# Altium PCB LINKER.PcbDoc (part 2 of 2)
Units mm, origin at the board's own origin, x right, y up, seen from the top; angles counter-clockwise.
Board outline 200 x 129 mm, 4 copper layers (Top Layer, Mid1, Mid2, Bottom Layer), stack 0.603 mm thick; 27 components, 98 nets, 425 pads, 14 vias.
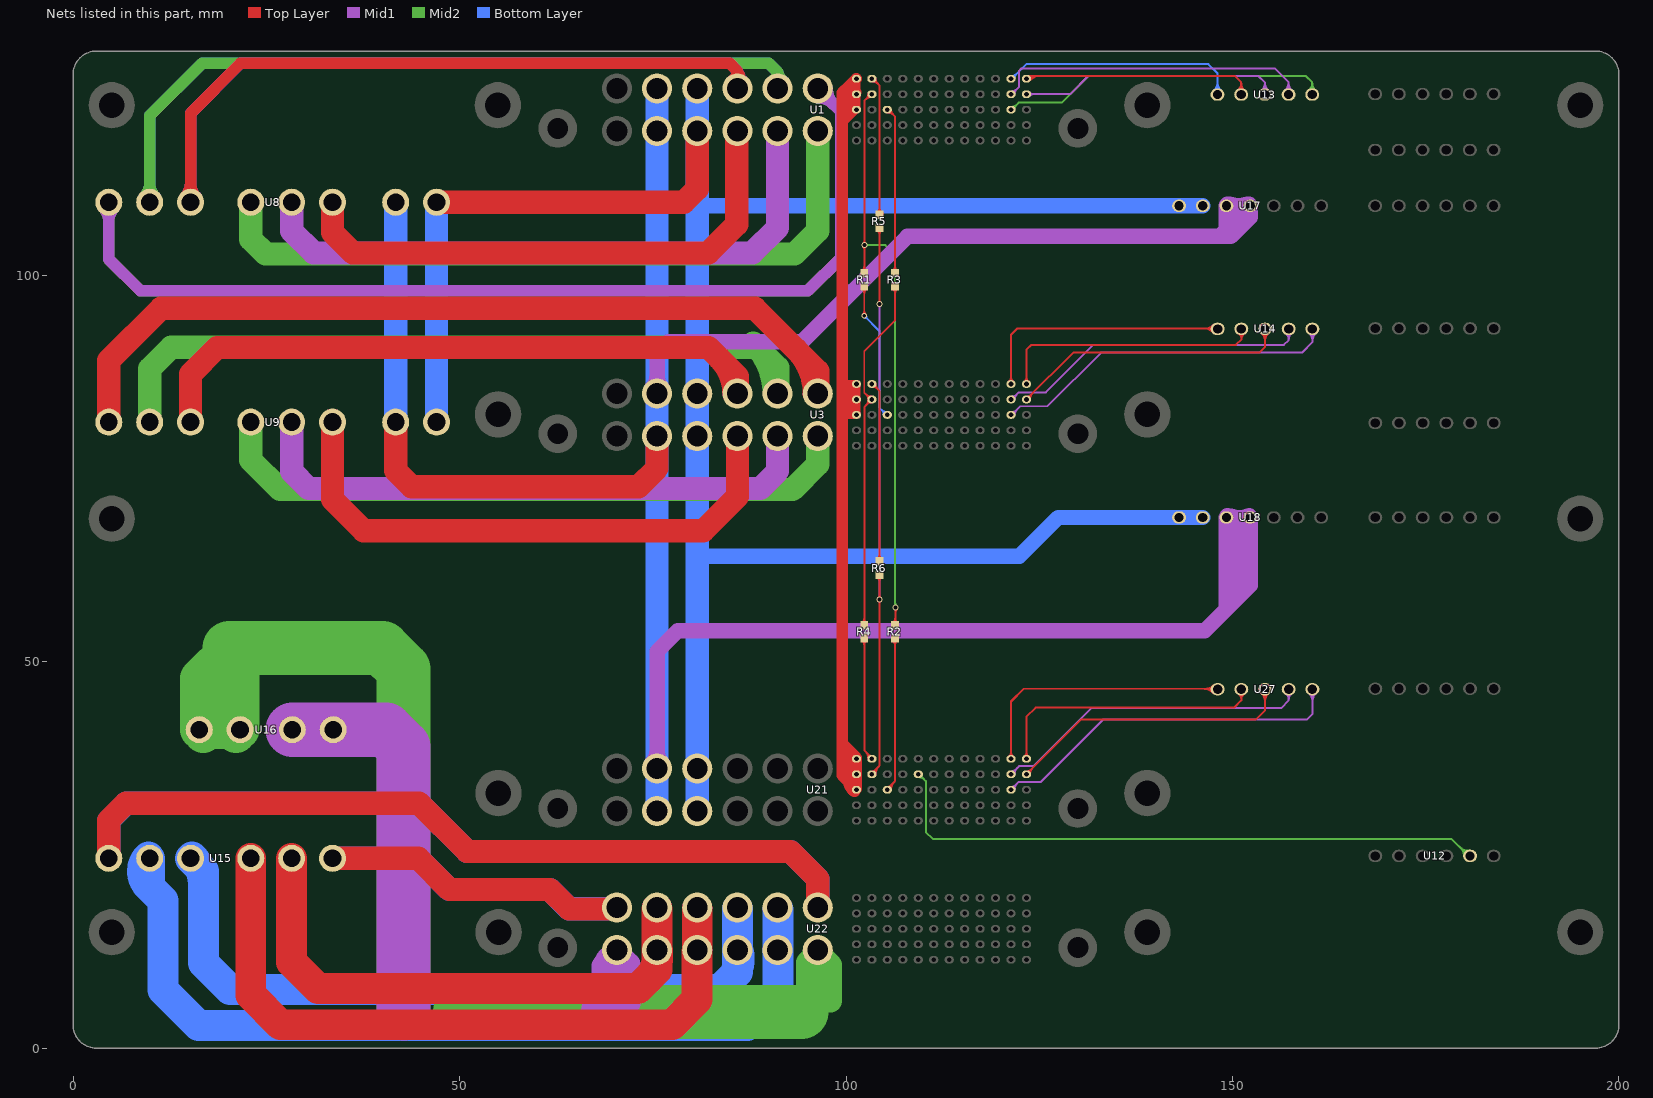
[diagram p4: the nets of this part, all layers, seen from the top]

## Via types
v1: diameter 0.762, hole 0.508, Top Layer to Bottom Layer, 14 vias

## Nets (pads, with @x,y where several pads share a name; then routed paths per layer and width w, separated by ;. In a path a pad name is that pad's centre, name@x,y a point inside that pad or via, vN(x,y) a via of type N, cw(c..) or ccw(c..) an arc to the next point about the centre after c; other vN are vias at no path point) (continued)
D_SIN-3: U12.2 U21.D8 | length 85.2
  Mid2 w0.254: U21.D8@109.35,35.43 109.45,35.43 110.346,34.534 110.346,27.957 111.227,27.076 178.335,27.076 180.541,24.871 U12.2@180.741,24.871 ; U21.D8@109.45,35.057 cw(c109.45,34.157) 110.087,34.793 cw(c110.723,35.43) U21.D8@109.823,35.43 ; 179.322,26.09 ccw(c180.641,27.41) U12.2@180.641,25.544 ; 179.563,25.849 cw(c178.585,24.871) U12.2@179.968,24.871 ; 179.755,25.656 ccw(c180.641,26.542) U12.2@180.641,25.29 ; 179.997,25.415 cw(c179.452,24.871) U12.2@180.222,24.871
HVA11: U1.1 U8.1 | length 274.4
  Mid1 w1.5: U8.1@3.91,108.737 cw(c2.203,107.03) 4.617,107.03 cw(c7.032,107.03) U8.1@5.325,108.737 ; U8.1@4.617,109.444 4.617,102.075 8.712,97.98 95.072,97.98 99.304,102.212 99.304,121.194 96.357,124.141 96.357,124.18 U1.1@96.357,124.187 ; U1.1@96.35,122.98 cw(c96.35,120.159) 98.344,122.154 ; U1.1@97.55,124.18 ccw(c100.524,124.18) 98.421,122.077
  Mid2 w1.5: U8.1@3.91,108.737 cw(c2.203,107.03) 4.617,107.03 cw(c7.032,107.03) U8.1@5.325,108.737 ; U8.1@4.617,109.616 U8.1@4.617,109.444 4.617,102.075 8.712,97.98 95.072,97.98 99.492,102.4 99.492,121.052 96.357,124.187 U1.1@96.35,124.194 ; U1.1@96.35,122.98 cw(c96.35,120.049) 98.422,122.122 ; U1.1@97.55,124.18 ccw(c100.413,124.18) 98.389,122.155
HVA12: U1.7 U8.4 | length 93.3
  Mid2 w3: U8.4@22.987,109.616 U8.4@22.987,109.444 22.987,106.06 22.987,104.663 24.892,102.758 93.345,102.758 96.35,105.763 U1.7@96.35,118.68 U1.7@96.35,118.694
HVA21: U3.1 U9.1 | length 115
  Top Layer w3: U9.1@4.617,81.168 4.617,88.971 11.379,95.733 88.214,95.733 96.35,87.597 U3.1@96.35,84.981 ; 93.519,90.428 cw(c87.772,84.68) U3.1@95.9,84.68
  Bottom Layer w3: U3.1@96.35,84.68 U3.1@96.35,84.981
HVA22: U3.7 U9.4 | length 85
  Mid2 w3: U9.4@22.987,81.168 U9.4@22.987,80.996 22.987,76.088 26.797,72.278 93.091,72.278 96.35,75.537 U3.7@96.35,79.18
HVB11: U1.2 U8.2 | length 213.6
  Mid2 w1.5: U8.2@9.201,110.151 ccw(c7.494,111.858) 9.908,111.858 ccw(c12.322,111.858) U8.2@10.615,110.151 ; U8.2@9.908,109.616 9.908,120.665 16.688,127.444 89.986,127.444 91.161,126.269 ; U1.2@90.553,125.221 ccw(c89.953,126.269) 91.161,126.269 ; 90.76,126.67 cw(c88.89,124.801) U1.2@91.439,124.101 ; U1.2@91.15,124.194 91.161,124.205 91.161,126.269 ; U1.2@91.762,125.212 cw(c92.39,126.269) 91.161,126.269
  Bottom Layer w1.5: U8.2@9.201,110.151 ccw(c7.494,111.858) 9.908,111.858 ccw(c12.322,111.858) U8.2@10.615,110.151 ; U8.2@9.908,109.616 9.908,120.665 16.688,127.444 89.986,127.444 91.161,126.269 ; U1.2@90.553,125.221 ccw(c89.953,126.269) 91.161,126.269 ; 90.76,126.67 cw(c88.89,124.801) U1.2@91.439,124.101 ; U1.2@91.15,124.194 91.161,124.205 91.161,126.269 ; U1.2@91.762,125.212 cw(c92.39,126.269) 91.161,126.269
HVB12: U1.8 U8.5 | length 81.8
  Mid1 w3: U8.5@28.278,109.616 U8.5@28.278,109.444 28.278,105.722 31.115,102.885 87.884,102.885 91.15,106.151 U1.8@91.15,118.68 U1.8@91.15,118.694
HVB21: U3.2 U9.2 | length 100.9
  Mid2 w3: U9.2@9.908,81.168 9.908,87.901 12.7,90.693 88.519,90.693 91.161,88.051 91.161,84.691 U3.2@91.15,84.68 ; 87.99,91.222 cw(c81.449,84.68) U3.2@90.7,84.68
HVB22: U3.8 U9.5 | length 75.8
  Mid1 w3: U9.5@28.278,81.168 U9.5@28.278,80.996 28.278,74.607 30.48,72.405 88.9,72.405 91.15,74.655 U3.8@91.15,79.18
HVC11: U1.3 U8.3 | length 194.6
  Top Layer w1.5: U8.3@14.492,110.151 ccw(c12.785,111.858) 15.199,111.858 ; U8.3@15.199,109.616 15.199,120.97 21.648,127.419 84.938,127.419 85.954,126.403 ; 15.199,111.858 ccw(c17.613,111.858) U8.3@15.906,110.151 ; U1.3@85.294,125.185 ccw(c84.5,126.403) 85.954,126.403 ; 85.576,126.781 cw(c83.685,124.89) U1.3@86.236,124.09 ; U1.3@85.639,124.505 85.95,124.194 85.954,124.198 85.954,126.403 ; U1.3@86.611,125.182 cw(c87.416,126.403) 85.954,126.403
  Mid1 w1.5: U8.3@14.492,110.151 ccw(c12.785,111.858) 15.199,111.858 ; U8.3@15.199,109.616 15.199,120.952 21.666,127.419 84.988,127.419 85.954,126.453 ; 15.199,111.858 ccw(c17.613,111.858) U8.3@15.906,110.151 ; U1.3@85.275,125.173 ccw(c84.405,126.453) 85.954,126.453 ; 85.579,126.828 cw(c83.673,124.923) U1.3@86.235,124.087 ; U1.3@85.95,124.194 85.954,124.198 85.954,126.453 ; U1.3@86.629,125.169 cw(c87.512,126.453) 85.954,126.453
HVC12: U1.9 U8.6 | length 71.2
  Top Layer w3: U8.6@33.569,109.616 U8.6@33.569,109.444 33.569,105.511 36.195,102.885 82.169,102.885 85.854,106.57 85.854,118.598 85.943,118.687 U1.9@85.95,118.694
HVC21: U3.3 U9.3 | length 87.1
  Top Layer w3: U9.3@15.199,81.168 15.199,87.223 18.644,90.668 82.194,90.668 85.95,86.912 U3.3@85.95,84.68 ; 83.604,89.258 cw(c79.025,84.68) U3.3@85.5,84.68
HVC22: U3.9 U9.6 | length 73.9
  Top Layer w3: U9.6@33.569,81.168 U9.6@33.569,80.996 33.569,70.967 37.592,66.944 81.534,66.944 85.95,71.36 U3.9@85.95,79.18
HVCC: U1.4 U1.10 U3.4 U3.10 U8.8 U9.8 U17.1 U17.2 U18.1 U18.2 U21.4 U21.10 | length 296.9
  Top Layer w3: U8.8@47.028,109.444 79.015,109.444 80.75,111.179 U1.10@80.75,118.68
  Bottom Layer w2: 80.75,63.83 80.928,63.652 122.448,63.652 127.455,68.659 U18.1@143.096,68.659 U18.2@146.161,68.659 ; 80.75,108.864 80.867,108.981 U17.1@143.096,108.981 U17.2@146.161,108.981
  Bottom Layer w3: U9.8@47.028,80.996 U8.8@47.028,109.444 ; U21.10@80.75,30.68 U21.4@80.75,36.18 80.75,63.83 U3.10@80.75,79.18 U3.4@80.75,84.68 80.75,108.864 U1.10@80.75,118.68 U1.4@80.75,124.18
HVCC_IN: U16.1 U16.2 U22.7 | length 197.5
  Mid2 w3: 94.22,4.685 96.254,6.719 ; 95.047,8.306 95.047,11.084 ; 95.047,8.448 cw(c100.582,8.448) U22.7@96.668,12.362 ; U22.7@96.032,12.362 cw(c91.296,7.626) 97.993,7.626 ; U22.7@96.254,12.426 96.35,12.522 U22.7@96.35,12.387 ; 95.047,11.084 U22.7@96.35,12.387 ; 95.047,11.084 96.254,9.876 96.254,6.719 ; 96.254,6.719 97.395,6.719 97.993,6.121 97.993,10.743 U22.7@96.35,12.387
  Mid2 w5: U16.1@16.85,40.668 ccw(c11.783,45.735) 18.948,45.735 ; 18.948,45.815 ccw(c26.226,45.815) U16.2@21.08,40.668 ; 16.319,46.548 U16.1@16.319,41.199 18.948,41.199 ; 16.319,46.548 16.319,47.841 20.244,51.765 20.244,50.472 ; 16.319,46.548 20.244,50.472 ; 18.948,41.199 18.948,46.443 21.61,49.105 ; 18.948,41.199 U16.2@21.61,41.199 21.61,49.105 ; 20.244,50.472 21.61,49.105
  Mid2 w7: 20.244,51.765 40.005,51.765 42.748,49.022 42.748,11.989 42.748,4.978 ; 50.052,4.685 94.22,4.685
HVGND: U1.5 U1.11 U3.5 U3.11 U8.7 U9.7 U17.3 U17.4 U18.3 U18.4 U21.5 U21.11 | length 448.9
  Top Layer w3: U9.7@41.738,80.996 41.738,74.721 43.815,72.644 73.152,72.644 75.55,75.042 U3.11@75.55,79.18
  Mid1 w2: U21.5@74.878,36.852 ccw(c73.256,38.474) 75.55,38.474 ccw(c77.843,38.474) U21.5@76.222,36.852 ; U3.5@74.878,85.352 ccw(c73.256,86.974) 75.55,86.974 ccw(c77.843,86.974) U3.5@76.222,85.352 ; U21.5@75.55,36.18 75.55,51.318 78.207,53.975 146.406,53.975 149.225,56.794 ; U3.5@75.55,84.68 75.55,89.901 77.064,91.415 94.336,91.415 107.95,105.029 148.337,105.029 ; U17.3@149.216,108.813 ccw(c149.904,109.877) 150.8,108.981 ; 149.225,105.917 148.541,105.232 ; U18.3@149.359,68.856 cw(c149.082,67.241) 150.721,67.241 ; U18.3@149.466,68.8 cw(c146.438,65.772) 150.721,65.772 ; U17.3@149.466,109.122 cw(c148.24,107.896) 149.974,107.896 ; 149.936,105.232 148.541,105.232 ; 150.266,59.417 150.467,59.617 150.467,62.436 ; 150.721,65.596 cw(c155.252,65.596) U18.4@152.048,68.8 ; 150.721,67.169 cw(c152.43,67.169) U18.4@152.157,68.856 ; 148.337,105.029 148.541,105.232 ; 148.337,105.029 149.809,105.029 151.74,106.959 ; 149.225,56.794 149.225,61.195 ; 149.225,56.794 152.289,59.859 152.289,64.259 ; 149.225,61.195 U18.3@149.225,68.659 150.47,68.659 ; 149.225,61.195 150.266,62.236 150.467,62.436 ; 149.974,105.943 149.225,105.943 U17.3@149.225,108.981 150.8,108.981 ; 149.974,105.943 150.444,105.943 150.546,105.842 149.974,105.842 149.974,105.943 ; 149.974,105.943 149.974,106.959 ; 149.974,106.959 151.74,106.959 ; 149.974,106.959 149.974,108.155 150.012,108.194 150.8,108.981 ; 150.467,62.436 150.721,62.69 ; 150.47,68.659 U18.4@152.289,68.659 152.289,64.259 ; 150.47,68.659 150.721,68.408 150.721,64.795 150.721,62.69 ; 150.721,62.69 151.257,63.227 152.289,64.259 ; 150.8,108.981 151.545,108.236 152.272,107.509 152.289,107.509 ; 150.8,108.981 U17.4@152.289,108.981 152.289,107.509 ; 151.74,106.959 152.289,107.509 ; U18.3@149.325,68.859 cw(c149.325,66.578) 150.938,68.191 ccw(c149.325,66.578) U18.3@149.325,68.859 ; U17.3@149.325,109.181 cw(c149.325,106.103) 151.501,108.28 ccw(c149.325,106.103) U17.3@149.325,109.181 ; 150.159,108.34 cw(c152.189,106.309) 152.189,109.181 ccw(c152.189,106.309) 150.159,108.34
  Mid1 w4: 150.266,59.417 150.266,62.236 ; 150.721,64.795 151.257,64.259 151.257,63.227
  Bottom Layer w3: U9.7@41.738,80.996 U8.7@41.738,109.444 ; U21.11@75.55,30.68 U21.5@75.55,36.18 U3.11@75.55,79.18 U3.5@75.55,84.68 U1.11@75.55,118.68 U1.5@75.55,124.18
M_RS422_A1: U1.E2 U13.1 | length 36.3
  Bottom Layer w0.254: U1.E2@121.35,125.444 121.45,125.444 123.326,127.32 146.873,127.32 148.066,126.127 U13.1@148.066,123.38 ; U1.E2@121.45,125.803 ccw(c121.45,126.67) 122.063,126.057 ; U1.E2@121.823,125.43 cw(c122.757,125.43) 122.097,126.091 ; U13.1@147.59,123.856 ccw(c146.441,125.005) 148.066,125.005 ccw(c149.69,125.005) U13.1@148.542,123.856 ; U13.1@147.769,123.677 ccw(c147.054,124.392) 148.066,124.392 ccw(c149.077,124.392) U13.1@148.362,123.677
M_RS422_A2: U3.E2 U14.1 | length 39
  Top Layer w0.254: U3.E2@121.086,86.194 ccw(c120.449,86.831) 121.35,86.831 ccw(c122.25,86.831) U3.E2@121.614,86.194 ; U3.E2@121.35,85.93 121.35,92.281 122.191,93.122 U14.1@148.086,93.122 ; 146.208,93.122 cw(c146.208,91.28) U14.1@147.51,92.583 ; 146.515,93.122 ccw(c146.515,94.53) U14.1@147.51,93.534 ; 146.821,93.122 cw(c146.821,91.894) U14.1@147.69,92.762 ; 147.128,93.122 ccw(c147.128,93.917) U14.1@147.69,93.355
M_RS422_A3: U21.E2 U27.1 | length 40.3
  Top Layer w0.254: U21.E2@121.086,37.694 ccw(c120.449,38.331) 121.35,38.331 ccw(c122.25,38.33) U21.E2@121.614,37.694 ; U21.E2@121.35,37.56 121.35,44.85 123,46.5 U27.1@148.086,46.5 ; 146.208,46.5 cw(c146.208,44.658) U27.1@147.51,45.961 ; 146.515,46.5 ccw(c146.515,47.908) U27.1@147.51,46.912 ; 146.821,46.5 cw(c146.821,45.272) U27.1@147.69,46.14 ; 147.128,46.5 ccw(c147.128,47.295) U27.1@147.69,46.733
M_RS422_B1: U1.E1 U13.2 | length 37.5
  Top Layer w0.254: U1.E1@123.35,125.444 123.712,125.806 150.275,125.806 151.13,124.952 ; U1.E1@123.354,125.525 cw(c124.032,124.848) 124.032,125.806 ; U1.E1@123.534,125.346 cw(c124.645,124.235) 124.645,125.806 ; U1.E1@123.714,125.166 cw(c125.259,123.621) 125.259,125.806 ; U13.2@150.666,123.868 ccw(c149.633,124.952) 151.13,124.952 ; U13.2@150.841,123.684 ccw(c150.198,124.359) 151.13,124.359 ccw(c152.062,124.359) U13.2@151.419,123.684 ; U13.2@151.13,123.38 151.13,124.952 ; U13.2@151.594,123.868 cw(c152.627,124.952) 151.13,124.952
M_RS422_B2: U3.E1 U14.2 | length 38.1
  Top Layer w0.254: U3.E1@123.086,86.194 ccw(c122.449,86.831) 123.35,86.831 ccw(c124.25,86.831) U3.E1@123.614,86.194 ; U3.E1@123.35,85.93 123.35,90.35 124,91 150.436,91 151.181,91.745 ; U14.2@150.777,92.498 cw(c150.275,91.744) 151.181,91.744 ; U14.2@150.918,92.71 cw(c150.591,92.219) 151.181,92.219 ; U14.2@151.035,93.174 U14.2@151.15,93.058 151.181,93.028 151.181,91.745 ; U14.2@151.564,92.527 ccw(c152.173,91.745) 151.181,91.745
M_RS422_B3: U21.E1 U27.2 | length 40.3
  Top Layer w0.254: U21.E1@123.086,37.694 ccw(c122.449,38.331) 123.35,38.331 ccw(c124.25,38.33) U21.E1@123.614,37.694 ; U21.E1@123.35,37.56 123.35,42.85 124.544,44.044 150.202,44.044 151.15,44.992 ; U27.2@150.717,45.921 cw(c149.937,44.992) 151.15,44.992 ; U27.2@150.881,46.116 cw(c150.395,45.537) 151.15,45.537 cw(c151.905,45.537) U27.2@151.42,46.116 ; U27.2@151.15,46.436 151.15,44.992 ; U27.2@151.583,45.921 ccw(c152.363,44.992) 151.15,44.992
M_RS422_Y1: U1.D1 U13.3 | length 39.1
  Mid1 w0.254: U1.D1@123.35,123.444 129.017,123.444 131.354,125.781 153.365,125.781 154.194,124.952 ; U1.D1@123.714,123.166 cw(c124.384,122.496) 124.384,123.444 ; U1.D1@123.714,123.694 ccw(c124.317,124.297) 124.317,123.444 ; U13.3@153.73,123.868 ccw(c152.697,124.952) 154.194,124.952 ; U13.3@153.905,123.684 ccw(c153.262,124.359) 154.194,124.359 ccw(c155.127,124.359) U13.3@154.483,123.684 ; U13.3@154.194,123.38 154.194,124.952 ; U13.3@154.659,123.868 cw(c155.692,124.952) 154.194,124.952
M_RS422_Y2: U3.D1 U14.3 | length 41.6
  Top Layer w0.254: U3.D1@123.35,83.93 129.42,90 153.475,90 154.215,90.74 U14.3@154.215,93.058 ; U3.D1@123.45,84.303 ccw(c123.45,84.962) 123.916,84.496 ; U3.D1@123.823,83.93 cw(c124.965,83.93) 124.157,84.738 ; U14.3@153.739,92.583 cw(c152.59,91.434) 154.215,91.434 cw(c155.839,91.434) U14.3@154.691,92.583 ; U14.3@153.918,92.762 cw(c153.203,92.047) 154.215,92.047 cw(c155.226,92.047) U14.3@154.511,92.762
M_RS422_Y3: U21.D1 U27.3 | length 43
  Top Layer w0.254: U21.D1@123.35,35.56 123.45,35.56 130.39,42.5 153.015,42.5 154.215,43.699 U27.3@154.215,46.436 ; U21.D1@123.45,35.803 ccw(c123.45,36.39) 123.865,35.975 ; U21.D1@123.569,35.43 cw(c124.17,35.43) 123.745,35.855 ; U21.D1@123.823,35.43 cw(c125.037,35.43) 124.179,36.289 ; U27.3@153.739,45.961 cw(c152.59,44.812) 154.215,44.812 cw(c155.839,44.812) U27.3@154.691,45.961 ; U27.3@153.918,46.14 cw(c153.203,45.425) 154.215,45.425 cw(c155.226,45.425) U27.3@154.511,46.14
M_RS422_Z1: U1.D2 U13.4 | length 46.2
  Mid1 w0.254: U1.D2@121.35,123.444 121.45,123.444 122.354,124.348 122.354,126.406 122.709,126.761 155.449,126.761 157.259,124.952 ; U1.D2@121.45,123.803 ccw(c121.45,124.67) 122.063,124.057 ; U1.D2@121.823,123.43 cw(c122.757,123.43) 122.097,124.091 ; U13.4@156.794,123.868 ccw(c155.761,124.952) 157.259,124.952 ; U13.4@156.97,123.684 ccw(c156.326,124.359) 157.259,124.359 ccw(c158.191,124.359) U13.4@157.548,123.684 ; U13.4@157.259,123.38 157.259,124.952 ; U13.4@157.723,123.868 cw(c158.756,124.952) 157.259,124.952
M_RS422_Z2: U3.D2 U14.4 | length 45.4
  Mid1 w0.254: U3.D2@121.35,83.93 121.45,83.93 122.369,84.849 125.849,84.849 132,91 156.665,91 157.279,91.614 ; U3.D2@121.45,84.303 ccw(c121.45,85.204) 122.087,84.567 ccw(c122.723,83.93) U3.D2@121.823,83.93 ; U14.4@156.846,92.543 cw(c156.066,91.614) 157.279,91.614 ; U14.4@157.009,92.738 cw(c156.524,92.159) 157.279,92.159 cw(c158.034,92.159) U14.4@157.548,92.738 ; U14.4@157.279,93.058 157.279,91.614 ; U14.4@157.712,92.543 ccw(c158.492,91.614) 157.279,91.614
M_RS422_Z3: U21.D2 U27.4 | length 46.8
  Mid1 w0.254: U21.D2@121.35,35.43 121.35,35.46 U21.D2@121.45,35.56 ; U21.D2@121.35,35.56 U21.D2@121.45,35.56 ; U21.D2@121.45,35.803 ccw(c121.45,36.39) 121.865,35.975 ; U21.D2@121.569,35.43 cw(c122.17,35.43) 121.745,35.855 ; U21.D2@121.823,35.43 cw(c123.037,35.43) 122.179,36.289 ; U27.4@156.846,45.921 cw(c156.066,44.992) 157.279,44.992 ; U27.4@157.009,46.116 cw(c156.524,45.537) 157.279,45.537 cw(c158.034,45.537) U27.4@157.548,46.116 ; U27.4@157.279,46.436 157.279,44.992 ; U27.4@157.712,45.921 ccw(c158.492,44.992) 157.279,44.992 ; U21.D2@121.45,35.56 122.39,36.5 124.25,36.5 131.75,44 156.287,44 157.279,44.992
PGND: U16.3 U16.4 U22.12 | length 90.2
  Mid1 w3: 68.58,7.321 cw(c75.709,7.321) U22.12@70.668,12.362 ; 68.58,9.962 cw(c70.904,9.962) U22.12@70.44,12.239 ; 69.554,5.038 68.58,6.012 68.58,10.617 U22.12@70.35,12.387 ; U22.12@70.032,12.362 cw(c65.565,7.895) 71.882,7.895 ; U22.12@70.35,12.522 U22.12@70.35,12.387 ; U22.12@70.35,12.387 70.35,4.242 71.882,5.774 71.882,10.855 U22.12@70.35,12.387
  Mid1 w7: U16.3@28.363,41.199 U16.4@33.654,41.199 40.488,41.199 42.723,38.964 42.723,4.591 42.824,4.489 ; 69.19,4.674 69.554,5.038
RS422_GNDM1: U1.C2 U13.5 | length 48
  Mid2 w0.254: U1.C2@121.35,121.444 121.45,121.444 122.331,122.325 127.898,122.325 131.328,125.755 159.519,125.755 160.323,124.952 ; U1.C2@121.45,121.803 ccw(c121.45,122.67) 122.063,122.057 ; U1.C2@121.823,121.43 cw(c122.757,121.43) 122.097,122.091 ; U13.5@159.859,123.868 ccw(c158.826,124.952) 160.323,124.952 ; U13.5@160.034,123.684 ccw(c159.391,124.359) 160.323,124.359 ccw(c161.255,124.359) U13.5@160.612,123.684 ; U13.5@160.323,123.38 160.323,124.952 ; U13.5@160.787,123.868 cw(c161.82,124.952) 160.323,124.952
RS422_GNDM2: U3.C2 U14.5 | length 50.2
  Mid1 w0.254: U3.C2@121.35,81.93 121.45,81.93 122.569,83.049 126.049,83.049 133,90 159,90 160.343,91.343 U14.5@160.343,93.058 ; U3.C2@121.45,82.303 ccw(c121.45,83.204) 122.087,82.567 ccw(c122.723,81.93) U3.C2@121.823,81.93 ; U14.5@159.867,92.583 cw(c158.719,91.434) 160.343,91.434 cw(c161.968,91.434) U14.5@160.819,92.583 ; U14.5@160.047,92.762 cw(c159.332,92.047) 160.343,92.047 cw(c161.355,92.047) U14.5@160.64,92.762
RS422_GNDM3: U21.C2 U27.5 | length 52.4
  Mid1 w0.254: U21.C2@121.35,33.43 121.35,33.46 U21.C2@121.45,33.56 ; U21.C2@121.35,33.56 U21.C2@121.45,33.56 ; U21.C2@121.45,33.803 ccw(c121.45,34.39) 121.865,33.975 ; U21.C2@121.569,33.43 cw(c122.17,33.43) 121.745,33.855 ; U21.C2@121.823,33.43 cw(c123.037,33.43) 122.179,34.289 ; U27.5@159.867,45.961 cw(c158.719,44.812) 160.343,44.812 cw(c161.968,44.812) U27.5@160.819,45.961 ; U27.5@160.047,46.14 cw(c159.332,45.425) 160.343,45.425 cw(c161.355,45.425) U27.5@160.64,46.14 ; U27.5@160.343,46.436 160.343,43.224 159.619,42.5 133.25,42.5 125.167,34.417 122.307,34.417 U21.C2@121.45,33.56
SYNC_CLKIN11: R3.2 U1.C10 | length 24.4
  Top Layer w0.254: U1.C10@105.35,121.444 105.45,121.444 106.331,120.563 106.331,104.409 R3.2@106.331,100.345 ; U1.C10@105.45,121.057 cw(c105.45,120.123) 106.111,120.783 ; U1.C10@105.823,121.43 ccw(c106.69,121.43) 106.077,120.817 ; R3.2@106.067,100.559 ccw(c105.43,101.196) 106.331,101.196 ccw(c107.231,101.195) R3.2@106.595,100.559
SYNC_CLKIN12: R5.2 U1.E11 | length 21
  Top Layer w0.254: U1.E11@103.35,125.444 103.45,125.444 104.331,124.563 104.331,108.404 104.603,108.132 R5.2@104.775,107.96 ; U1.E11@103.45,125.057 cw(c103.45,124.123) 104.111,124.783 ; U1.E11@103.823,125.43 ccw(c104.69,125.43) 104.077,124.817 ; R5.2@104.067,108.174 ccw(c103.43,108.81) 104.331,108.81 ccw(c105.231,108.811) R5.2@104.595,108.174
SYNC_CLKIN21: R1.2 U3.C10 | length 22.6
  Top Layer w0.254: R1.2@102.105,98.231 cw(c101.485,97.611) 102.362,97.611 ; v1@102.182,94.937 ccw(c101.749,95.37) 102.362,95.37 ccw(c102.975,95.37) v1@102.542,94.937 ; v1(102.362,94.757) 102.362,98.438 R1.2@102.369,98.445 ; 102.362,97.578 cw(c103.286,97.578) R1.2@102.633,98.231
  Bottom Layer w0.254: v1@102.362,94.503 cw(c102.362,93.89) 102.796,94.323 cw(c103.229,94.757) v1@102.616,94.757 ; v1(102.362,94.757) 104.331,92.788 104.331,86.811 104.331,82.849 105.25,81.93 U3.C10@105.35,81.93 ; 104.613,82.567 cw(c103.976,81.93) U3.C10@104.877,81.93 ; 104.613,82.567 ccw(c105.25,83.203) U3.C10@105.25,82.303
SYNC_CLKIN22: R6.2 U3.E11 | length 26.2
  Top Layer w0.254: U3.E11@103.35,85.93 103.45,85.93 104.331,85.049 R6.2@104.331,63.068 ; U3.E11@103.45,85.557 cw(c103.45,84.657) 104.087,85.293 cw(c104.723,85.93) U3.E11@103.823,85.93 ; R6.2@104.067,63.282 ccw(c103.43,63.918) 104.331,63.918 ccw(c105.231,63.919) R6.2@104.595,63.282
SYNC_CLKIN31: R2.2 U21.C10 | length 23.2
  Top Layer w0.254: U21.C10@105.35,33.56 106.331,34.541 R2.2@106.331,52.913 ; U21.C10@105.45,33.803 ccw(c105.45,34.148) 105.694,33.904 ; U21.C10@105.569,33.43 cw(c106.411,33.43) 105.816,34.026 ; U21.C10@105.823,33.43 cw(c107.279,33.43) 106.249,34.459 ; R2.2@106.067,52.699 cw(c105.431,52.063) 106.331,52.063 cw(c107.232,52.062) R2.2@106.595,52.699
SYNC_CLKIN32: R4.2 U21.E11 | length 19.3
  Top Layer w0.254: R4.2@102.105,52.699 cw(c101.469,52.063) 102.369,52.063 cw(c103.27,52.062) R4.2@102.633,52.699 ; R4.2@102.369,52.913 102.369,38.541 U21.E11@103.35,37.56 ; 102.451,38.459 cw(c101.421,37.43) U21.E11@102.877,37.43 ; 102.884,38.026 cw(c102.289,37.43) U21.E11@103.131,37.43 ; 103.006,37.904 ccw(c103.25,38.148) U21.E11@103.25,37.803
SYNC_GND: U1.C12 U1.D12 U1.E12 U3.C12 U3.D12 U3.E12 U21.C12 U21.D12 U21.E12 | length 163.8
  Top Layer w0.5: U3.C12@101.238,81.906 101.325,81.906 U3.C12@101.35,81.93 ; U3.D12@101.321,83.901 U3.D12@101.35,83.93
  Top Layer w1: 99.511,81.906 99.536,81.93 ; 99.511,83.972 100.533,83.972 ; 99.511,86.004 99.586,85.93 ; 99.511,119.151 99.511,119.592 U1.C12@101.35,121.43 U1.D12@101.35,123.43 ; 99.511,121.766 99.686,121.766 U1.D12@101.35,123.43 ; 100.312,84.194 ccw(c101.016,84.898) U3.D12@101.25,83.93 ; 100.533,82.894 cw(c101.64,82.894) U3.D12@101.25,83.93 ; 100.533,84.826 cw(c101.742,84.826) U3.E12@101.25,85.93 ; 100.533,85.93 100.533,85.09 ; U21.D12@101.25,35.56 U21.D12@101.35,35.56 ; U3.C12@101.25,81.93 cw(c101.985,83.182) 100.533,83.182 ; U1.E12@101.35,125.43 U1.D12@101.35,123.43 ; 99.536,81.93 100.635,81.93 ; 99.536,81.93 99.988,82.382 99.988,82.637 100.533,83.182 ; 99.586,85.93 U3.E12@101.35,85.93 U3.D12@101.35,83.93 ; 99.586,85.93 99.75,85.766 99.75,84.756 99.974,84.531 100.533,83.972 ; 100.533,83.182 100.533,83.93 100.533,83.972 ; 100.533,83.182 100.533,82.032 100.635,81.93 ; 100.533,83.972 101.308,83.972 U3.D12@101.35,83.93 ; 100.533,83.972 100.533,85.09 ; 100.533,85.09 ccw(c101.83,85.09) U3.D12@101.25,83.93 ; 100.635,81.93 U3.C12@101.35,81.93 U3.D12@101.35,83.93
  Top Layer w1.5: 99.511,119.151 99.511,86.004 99.511,84.068 ; 99.511,119.592 99.511,121.056 ; 100.457,34.119 cw(c102.561,34.119) U21.D12@101.073,35.607 ; 100.457,34.637 cw(c101.557,34.637) U21.D12@101.16,35.663 ; 100.457,34.741 ccw(c102.561,34.741) U21.C12@101.073,33.253 ; 100.457,36.119 cw(c102.561,36.119) U21.E12@101.073,37.607 ; 100.457,36.626 cw(c101.573,36.626) U21.E12@101.157,37.662 ; 100.457,36.741 ccw(c102.561,36.741) U21.D12@101.073,35.253 ; 100.514,34.296 100.457,34.353 ; 100.533,85.09 99.974,84.531 99.511,84.068 ; 100.609,121.844 99.822,121.056 99.511,121.056 ; U1.D12@101.12,123.216 cw(c101.891,124.486) 100.406,124.486 ; U21.C12@101.129,33.212 cw(c101.763,34.353) 100.457,34.353 ; U21.C12@101.25,33.56 100.457,34.353 ; U21.D12@101.25,35.56 100.457,36.353 ; U21.E12@101.25,37.66 99.511,39.399 ; U21.C12@101.35,33.56 U21.D12@101.35,35.43 U21.E12@101.35,37.43 101.35,37.56 101.285,37.495 101.088,37.299 100.457,37.299 ; U1.E12@101.35,125.43 100.406,124.486 ; 99.511,37.299 99.511,39.399 ; 99.511,37.299 100.457,37.299 ; 99.511,37.299 99.511,35.299 100.457,34.353 ; 99.511,37.299 100.457,36.353 ; 99.511,39.399 99.511,81.906 99.511,83.972 99.511,84.068 ; 99.511,121.056 99.511,121.766 99.511,122.682 ; 99.511,122.682 99.511,123.592 100.406,124.486 ; 99.511,122.682 100.406,123.576 100.406,124.486 ; 100.457,34.353 100.457,35.43 100.457,36.353 ; 100.457,36.353 ccw(c101.763,36.353) 101.129,35.212 cw(c101.763,36.353) 100.457,36.353 ; 100.457,36.353 100.457,37.299 ; 99.986,123.156 cw(c101.25,121.892) 101.25,123.68 ccw(c101.25,121.892) 99.986,123.156
SYNC_OUT1: R1.1 R2.1 U1.D11 | length 85.6
  Top Layer w0.254: R1.1@102.105,100.559 ccw(c101.468,101.195) 102.369,101.195 ccw(c103.269,101.195) R1.1@102.633,100.559 ; v1@102.189,103.721 cw(c101.756,103.288) 102.369,103.288 cw(c102.982,103.288) v1@102.549,103.721 ; v1@102.189,104.081 ccw(c101.756,104.514) 102.369,104.514 ccw(c102.982,104.514) v1@102.549,104.081 ; R1.1@102.369,100.345 v1(102.369,103.901) 102.369,122.563 103.25,123.444 U1.D11@103.35,123.444 ; 102.589,122.783 cw(c103.25,122.123) U1.D11@103.25,123.057 ; 102.623,122.817 ccw(c102.01,123.43) U1.D11@102.877,123.43 ; R2.1@106.067,55.027 ccw(c105.201,55.893) 106.426,55.893 ; v1@106.246,56.82 cw(c105.813,56.387) 106.426,56.387 cw(c107.039,56.387) v1@106.606,56.82 ; R2.1@106.247,54.847 ccw(c105.814,55.28) 106.426,55.28 ; R2.1@106.331,54.813 106.426,54.908 v1(106.426,57) ; 106.426,55.434 ccw(c107.002,55.434) R2.1@106.595,55.027
  Mid1 w0.254: v1@106.331,57 v1(106.426,57)
  Mid2 w0.254: v1(102.369,103.901) 105.099,103.901 106.35,102.65 106.35,57.076 v1(106.426,57) ; v1@102.549,103.721 cw(c102.982,103.288) 102.982,103.901 cw(c102.982,104.514) v1@102.549,104.081 ; v1@106.246,57.18 ccw(c105.997,57.429) 106.35,57.429 ; 106.35,57.797 ccw(c107.223,57.797) v1@106.606,57.18
SYNC_OUT2: R3.1 R4.1 U3.D11 | length 52
  Top Layer w0.254: R4.1@102.105,55.027 ccw(c101.469,55.663) 102.369,55.663 ccw(c103.27,55.664) R4.1@102.633,55.027 ; R4.1@102.369,54.813 102.369,82.949 U3.D11@103.35,83.93 103.25,83.93 102.362,84.818 102.362,90.185 106.369,94.192 106.369,98.307 106.231,98.445 R3.1@106.331,98.445 ; 102.543,83.123 ccw(c101.735,83.93) 102.877,83.93 ccw(c101.976,83.93) 102.613,84.567 ccw(c103.25,85.203) U3.D11@103.25,84.303 ; 102.784,83.364 cw(c103.25,82.898) U3.D11@103.25,83.557 ; R3.1@106.067,98.231 cw(c105.339,97.503) 106.369,97.503 ; 106.369,97.686 cw(c107.14,97.686) R3.1@106.595,98.231
SYNC_OUT3: R5.1 R6.1 U21.D11 | length 83.8
  Top Layer w0.254: U21.D11@103.35,35.56 104.331,36.541 v1(104.331,58.054) R6.1@104.331,61.168 ; U21.D11@103.45,35.803 ccw(c103.45,36.148) 103.694,35.904 ; U21.D11@103.569,35.43 cw(c104.411,35.43) 103.816,36.026 ; U21.D11@103.823,35.43 cw(c105.279,35.43) 104.249,36.459 ; R6.1@104.067,60.954 cw(c103.43,60.317) 104.331,60.317 cw(c105.231,60.318) R6.1@104.595,60.954 ; R5.1@104.067,105.846 cw(c103.43,105.209) 104.331,105.209 cw(c105.231,105.21) R5.1@104.595,105.846 ; v1@104.151,57.874 cw(c103.718,57.441) 104.331,57.441 cw(c104.944,57.441) v1@104.511,57.874 ; v1@104.151,58.234 ccw(c103.718,58.667) 104.331,58.667 ccw(c104.944,58.667) v1@104.511,58.234 ; v1@104.151,96.461 ccw(c103.718,96.894) 104.331,96.894 ccw(c104.944,96.894) v1@104.511,96.461 ; v1(104.331,96.281) R5.1@104.331,106.06
  Mid1 w0.254: v1@104.151,58.234 ccw(c103.718,58.667) 104.331,58.667 ccw(c104.944,58.667) v1@104.511,58.234 ; v1@104.151,96.101 cw(c103.718,95.668) 104.331,95.668 cw(c104.944,95.668) v1@104.511,96.101 ; v1@104.267,58.054 104.299,58.086 104.331,58.118 v1(104.331,96.281)
UU_OUT1: U15.1 U22.1 | length 210.9
  Top Layer w3: U15.1@4.617,24.562 4.617,29.459 6.833,31.674 44.755,31.674 50.978,25.451 92.786,25.451 96.35,21.887 U22.1@96.35,18.18 U22.1@96.35,18.022
  Bottom Layer w3: U15.1@4.617,24.562 4.617,29.408 6.883,31.674 44.755,31.674 50.978,25.451 92.786,25.451 96.35,21.887 U22.1@96.35,18.18 U22.1@96.35,18.022
UU_OUT2: U15.4 U22.4 U22.10 | length 90.1
  Top Layer w3: U22.10@80.719,12.491 U22.10@80.75,12.522
  Top Layer w4: U15.4@22.987,24.562 22.987,6.888 26.853,3.023 77.47,3.023 80.719,6.272 U22.10@80.719,12.491 ; U22.10@80.75,12.522 U22.10@80.75,12.68 U22.4@80.75,18.022
VV_OUT1: U15.2 U22.2 U22.8 | length 116.2
  Bottom Layer w3: U22.2@91.15,18.022 U22.2@91.211,17.961
  Bottom Layer w4: U15.2@9.728,24.735 ccw(c11.667,22.871) 9.765,20.969 ; U15.2@9.908,24.562 9.908,20.826 11.633,19.101 11.633,7.518 16.231,2.921 87.224,2.921 91.211,6.909 91.211,12.68 U22.2@91.211,17.961
VV_OUT2: U15.5 U22.5 U22.11 | length 75.1
  Top Layer w4: U15.5@28.278,24.562 28.278,11.118 31.699,7.696 73.101,7.696 75.55,10.145 U22.11@75.55,12.68 U22.5@75.55,18.022 ; 74.369,8.964 ccw(c71.284,12.048) U22.11@75.599,12.687
WW_OUT1: U15.3 U22.3 U22.9 | length 101.8
  Bottom Layer w4: U15.3@15.199,24.562 16.866,22.895 16.866,11.024 20.295,7.595 83.715,7.595 85.95,9.83 U22.9@85.95,12.68 U22.3@85.95,18.022 ; U15.3@15.376,24.739 cw(c11.78,21.142) 16.866,21.142 ; 85.14,9.02 ccw(c82.613,11.547) U22.9@85.997,12.696
WW_OUT2: U15.6 U22.6 | length 79
  Top Layer w3: U15.6@33.569,24.562 44.653,24.562 48.692,20.523 61.671,20.523 64.172,18.022 U22.6@70.35,18.022
  Bottom Layer w3: U15.6@33.569,24.562 44.653,24.562 48.692,20.523 61.671,20.523 64.16,18.034 70.338,18.034 U22.6@70.35,18.022
pads on no net: U1.0 U1.6 U1.12 U1.A2 U1.A3 U1.A4 U1.A5 U1.A6 U1.A7 U1.A8 U1.A9 U1.A10 U1.A11 U1.A12 U1.B2 U1.B4 U1.B7 U1.B9 U1.B10 U1.B11 U1.B12 U1.C4 U1.C7 U1.C9 U1.C11 U1.D6 U1.D7 U1.D10 U1.E6 U1.E7 U1.E10 U3.0 U3.6 U3.12 U3.A2 U3.A3 U3.A4 U3.A5 U3.A6 U3.A7 U3.A8 U3.A9 U3.A10 U3.A11 U3.A12 U3.B2 U3.B4 U3.B7 U3.B9 U3.B10 U3.B11 U3.B12 U3.C4 U3.C7 U3.C9 U3.C11 U3.D6 U3.D7 U3.D10 U3.E6 U3.E7 U3.E10 U17.5 U17.6 U17.7 U18.5 U18.6 U18.7 U21.0 U21.1 U21.2 U21.3 U21.6 U21.7 U21.8 U21.9 U21.12 U21.A2 U21.A3 U21.A4 U21.A5 U21.A6 U21.A7 U21.A8 U21.A9 U21.A10 U21.A11 U21.A12 U21.B2 U21.B4 U21.B5 U21.B6 U21.B7 U21.B9 U21.B10 U21.B11 U21.B12 U21.C4 U21.C5 U21.C6 U21.C7 U21.C9 U21.C11 U21.D5 U21.D6 U21.D7 U21.D10 U21.E5 U21.E6 U21.E7 U21.E10 U22.0 U22.A1 U22.A2 U22.A3 U22.A4 U22.A5 U22.A6 U22.A7 U22.A8 U22.A9 U22.A10 U22.A11 U22.A12 U22.B1 U22.B2 U22.B3 U22.B4 U22.B5 U22.B6 U22.B7 U22.B8 U22.B9 U22.B10 U22.B11 U22.B12 U22.C1 U22.C2 U22.C3 U22.C4 U22.C5 U22.C6 U22.C7 U22.C8 U22.C9 U22.C10 U22.C11 U22.C12 U22.D1 U22.D2 U22.D3 U22.D4 U22.D5 U22.D6 U22.D7 U22.D8 U22.D9 U22.D10 U22.D11 U22.D12 U22.E1 U22.E2 U22.E3 U22.E4 U22.E5 U22.E6 U22.E7 U22.E8 U22.E9 U22.E10 U22.E11 U22.E12

## Other copper
Mid1:
  rectangle net PGND: 39.192,0.94 73.406,9.373
Mid2:
  rectangle net HVCC_IN: 13.818,47.396 24.105,55.27
  rectangle net HVCC_IN: 39.243,0.94 99.492,9.322

## Silkscreen, mask and mechanical layers (free items; w line width, h text height)
Top Overlay:
  text "X8-Y" at 167.005,124.562 h1
  text "X8-X" at 172.872,124.562 h1
  text "X8-E" at 178.587,124.562 h1
  text "X5-1" at 146.406,124.282 h1
  text "X5-3" at 152.197,124.282 h1
  text "X5-5" at 158.318,124.282 h1
  text "X5-2" at 149.149,121.488 h1
  text "X5-4" at 155.27,121.488 h1
  text "X8-Z" at 169.824,121.437 h1
  text "X8-F" at 176.047,121.437 h1
  text "X8-D" at 181.966,121.437 h1
  text "X8-T" at 167.081,117.29 h1
  text "X8-S" at 172.517,117.29 h1
  text "X8-P" at 178.892,117.29 h1
  text "X8-e" at 169.57,114.242 h1
  text "X8-R" at 175.768,114.242 h1
  text "X8-N" at 181.966,114.242 h1
  text "X8-U" at 21.209,112.192 h1
  text "X8-V" at 26.187,112.192 h1
  text "X8-W" at 31.775,112.192 h1
  text "X3-2" at 40.271,112.192 h1
  text "X3-1" at 45.696,112.192 h1
  text "X8-b" at 144.043,110.084 h1
  text "X8-d" at 150.393,110.084 h1
  text "X8-g" at 156.616,110.084 h1
  text "X8-L" at 166.902,110.051 h1
  text "X8-K" at 172.718,110.051 h1
  text "X8-H" at 178.713,110.051 h1
  text "X8-M" at 169.518,107.003 h1
  text "X8-J" at 175.461,107.003 h1
  text "X8-G" at 181.964,107.003 h1
  text "X8-a" at 141.097,106.832 h1
  text "X8-c" at 147.599,106.832 h1
  text "X8-f" at 153.822,106.832 h1
  text "X8-A" at 2.489,105.613 h1
  text "X8-B" at 8.331,105.613 h1
  text "X8-C" at 13.767,105.613 h1
  text "X9-Y" at 167.081,94.132 h1
  text "X9-X" at 172.491,94.132 h1
  text "X9-E" at 178.714,94.132 h1
  text "X6-2" at 149.25,94.107 h1
  text "X6-4" at 155.372,94.107 h1
  text "X6-1" at 146.329,91.161 h1
  text "X6-3" at 152.019,91.161 h1
  text "X6-5" at 158.344,91.161 h1
  text "X9-Z" at 169.469,91.11 h1
  text "X9-F" at 175.971,91.11 h1
  text "X9-D" at 181.991,91.11 h1
  text "X9-U" at 21.488,83.93 h1
  text "X9-V" at 26.899,83.93 h1
  text "X9-W" at 32.103,83.93 h1
  text "X4-2" at 39.726,83.93 h1
  text "X4-1" at 45.696,83.93 h1
  text "X9-T" at 167.107,81.777 h1
  text "X9-R" at 175.59,81.777 h1
  text "X9-N" at 181.889,81.777 h1
  text "X9-P" at 178.714,79.008 h1
  text "X9-e" at 169.113,78.881 h1
  text "X9-S" at 173.431,78.805 h1
  text "X9-A" at 3.151,77.637 h1
  text "X9-B" at 8.442,77.637 h1
  text "X9-C" at 13.733,77.637 h1
  text "X9-b" at 144.094,69.723 h1
  text "X9-d" at 150.292,69.723 h1
  text "X8-g" at 156.584,69.723 h1
  text "X9-M" at 169.641,69.681 h1
  text "X9-J" at 175.635,69.681 h1
  text "X9-G" at 181.604,69.681 h1
  text "X9-L" at 167.075,66.709 h1
  text "X9-K" at 172.765,66.709 h1
  text "X9-H" at 178.582,66.709 h1
  text "X9-a" at 141.122,66.497 h1
  text "X9-c" at 147.472,66.497 h1
  text "X9-f" at 154.051,66.497 h1
  text "X7-2" at 149.276,47.498 h1
  text "X7-4" at 155.354,47.498 h1
  text "X11-E" at 166.903,47.498 h1
  text "X11-D" at 172.466,47.498 h1
  text "X11-B" at 178.562,47.498 h1
  text "X7-1" at 146.202,44.628 h1
  text "X7-3" at 152.044,44.628 h1
  text "X7-5" at 158.217,44.628 h1
  text "X11-1F" at 169.316,44.577 h1
  text "X11-C" at 175.489,44.577 h1
  text "X11-A" at 181.508,44.577 h1
  text "X1-1" at 15.009,44.109 h1
  text "X2-1" at 20.167,44.109 h1
  text "X1-2" at 26.986,44.109 h1
  text "X2-2" at 32.144,44.109 h1
  text "X10-D" at 20.676,27.432 h1
  text "X10-E" at 26.264,27.432 h1
  text "X10-F" at 31.674,27.432 h1
  text "X11-K" at 172.415,25.908 h1
  text "X11-H" at 178.587,25.908 h1
  text "X11-L" at 166.98,25.883 h1
  text "X11-R" at 169.469,22.86 h1
  text "X11-J" at 175.641,22.86 h1
  text "X11-G" at 181.534,22.86 h1
  text "X10-A" at 2.337,20.904 h1
  text "X10-B" at 7.849,20.904 h1
  text "X10-C" at 13.4,20.904 h1
  text "CDL655215R2" at 157.912,15.57 h1.52
  text "ABC-DE" at 160.985,12.954 h1.52
Mechanical 1:
  the board outline again, w0.1

## Text inside footprints (layer, text, board x,y; h text height)
U1: Top Overlay "E" at 124.934,125.99 h0.8 r180; Top Overlay "D" at 124.934,123.895 h0.8 r180; Top Overlay "C" at 124.934,121.8 h0.8 r180; Top Overlay "B" at 124.934,119.43 h0.8 r180; Top Overlay "A" at 124.934,117.43 h0.8 r180
U3: Top Overlay "E" at 124.934,86.49 h0.8 r180; Top Overlay "D" at 124.934,84.395 h0.8 r180; Top Overlay "C" at 124.934,82.3 h0.8 r180; Top Overlay "B" at 124.934,79.93 h0.8 r180; Top Overlay "A" at 124.934,77.93 h0.8 r180
U21: Top Overlay "E" at 124.934,37.99 h0.8 r180; Top Overlay "D" at 124.934,35.895 h0.8 r180; Top Overlay "C" at 124.934,33.8 h0.8 r180; Top Overlay "B" at 124.934,31.43 h0.8 r180; Top Overlay "A" at 124.934,29.43 h0.8 r180
U22: Top Overlay "E" at 124.934,19.99 h0.8 r180; Top Overlay "D" at 124.934,17.895 h0.8 r180; Top Overlay "C" at 124.934,15.8 h0.8 r180; Top Overlay "B" at 124.934,13.43 h0.8 r180; Top Overlay "A" at 124.934,11.43 h0.8 r180